# Altium PCB MotorControlCircruit_ver1.1.PcbDoc
Units mm, origin at the board's own origin, x right, y up, seen from the top; angles counter-clockwise.
Board outline 87.38 x 68.07 mm, 2 copper layers (Top Layer, Bottom Layer); 44 components, 10 nets, 284 pads, 32 vias.
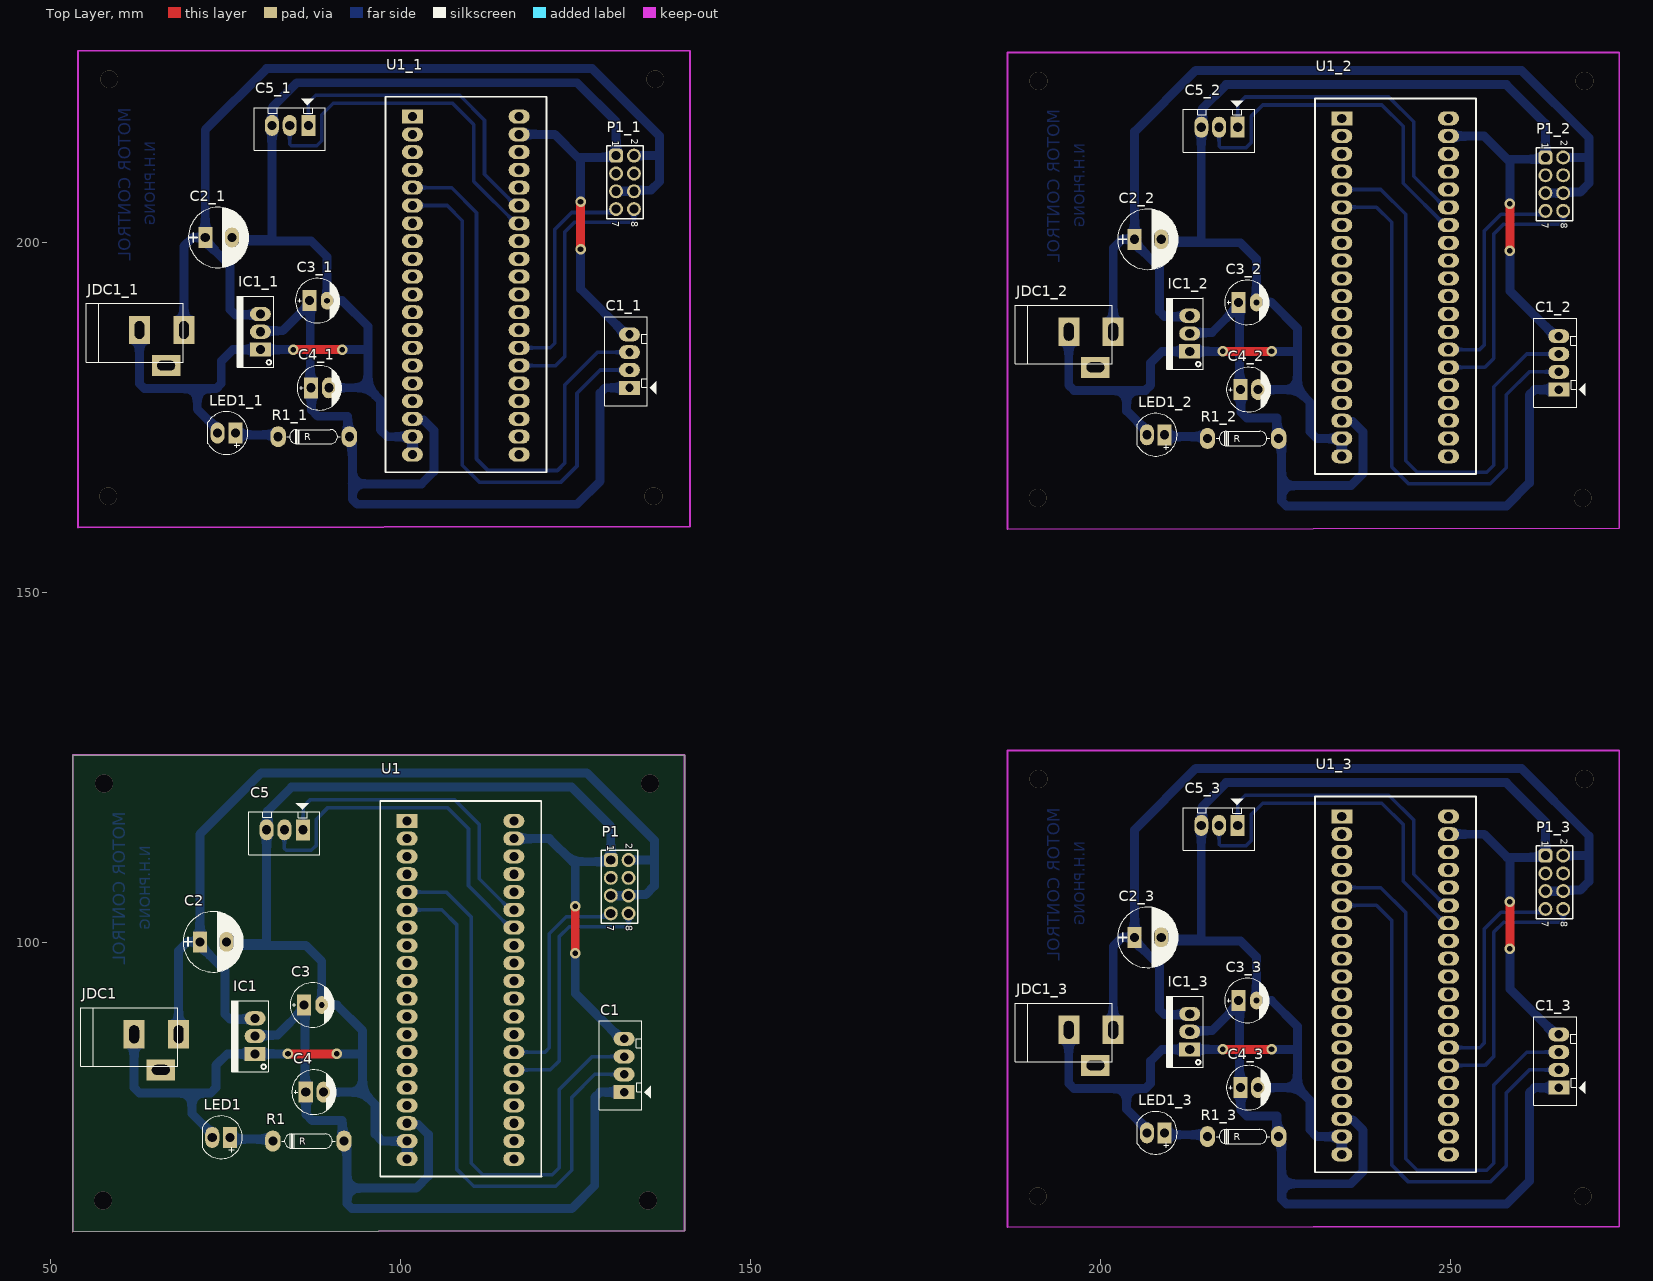
[diagram p0: Top Layer view]
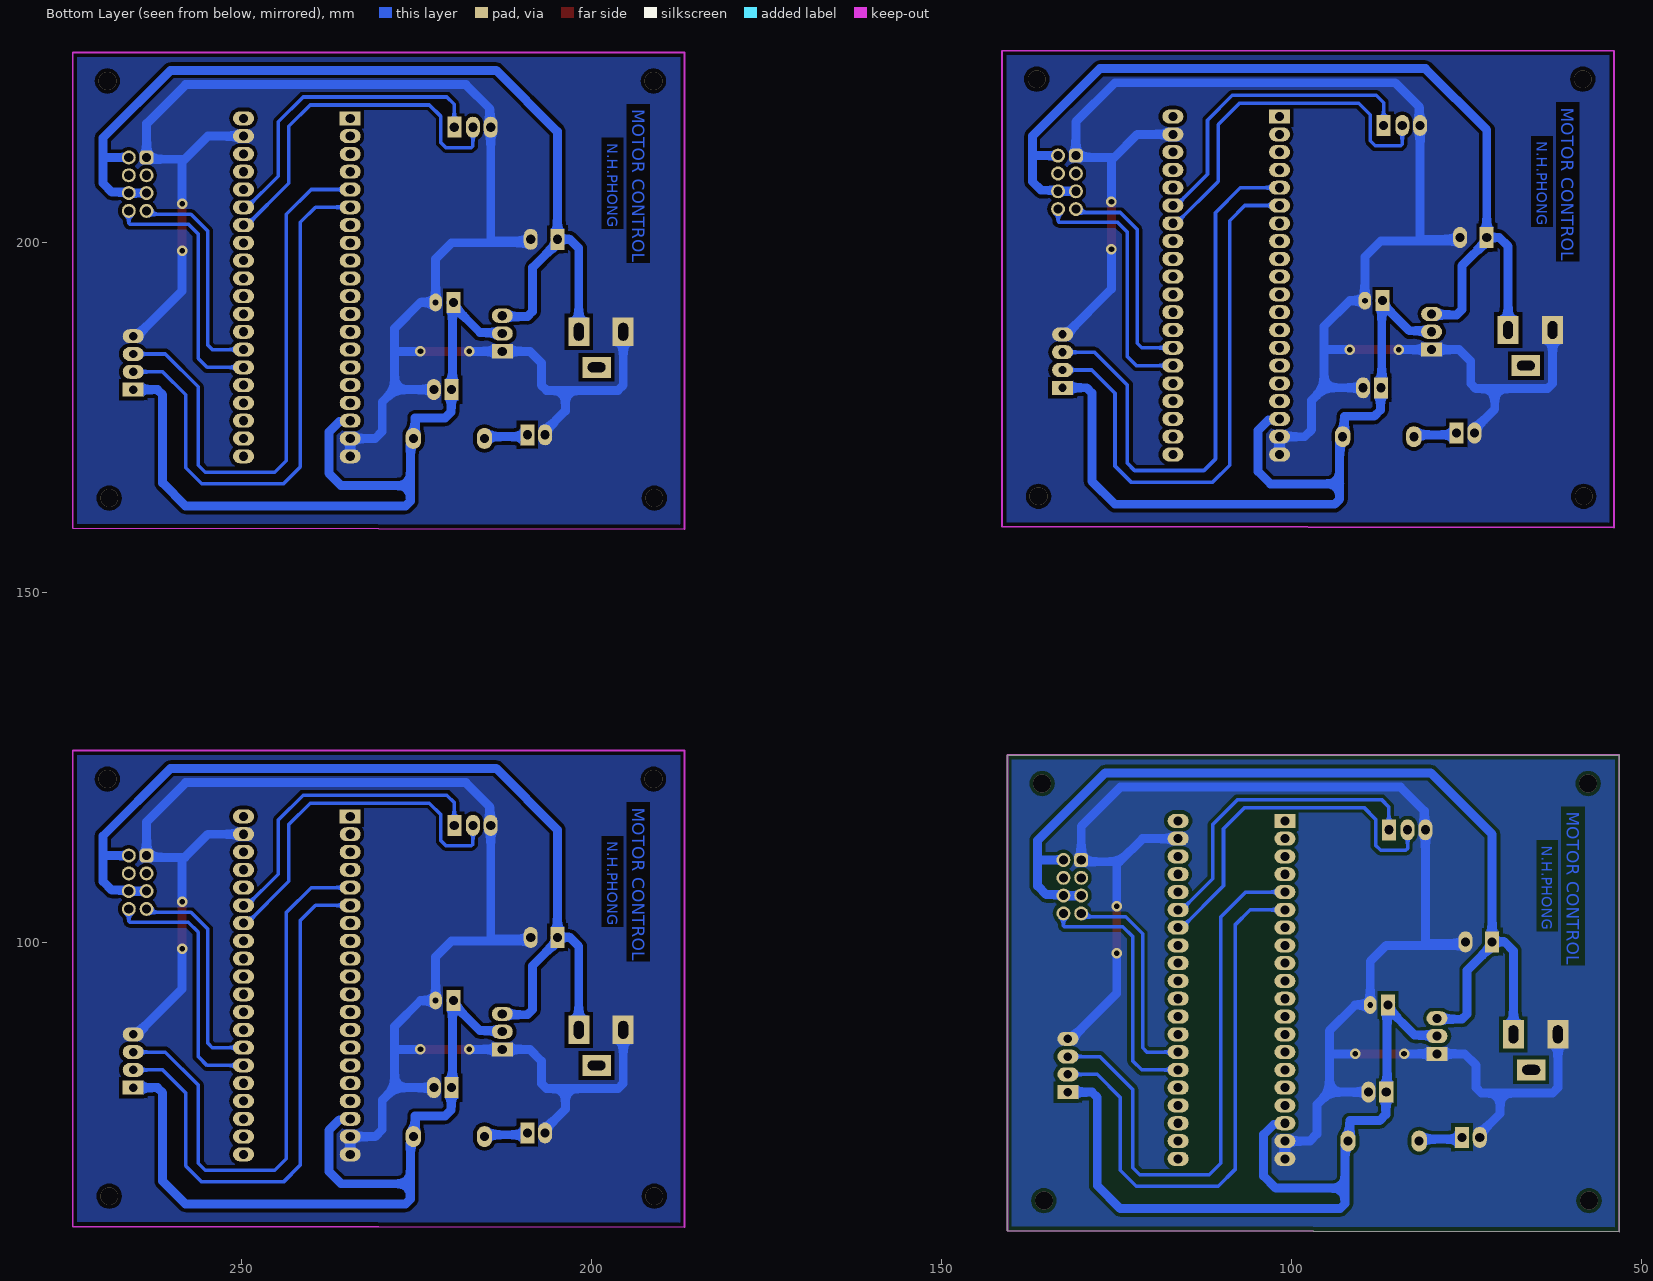
[diagram p1: Bottom Layer view, seen from below]

## Layer stack, top to bottom
Top Solder: solder mask 0.0102, Solder Resist, Dk 3.5
Top Layer: signal copper 0.0356
Dielectric 1: dielectric 0.32, FR-4, Dk 4.8
Bottom Layer: signal copper 0.0356
Bottom Solder: solder mask 0.0102, Solder Resist, Dk 3.5

## Board outline
53.213,58.68 53.213,126.746 140.589,126.746 140.589,58.801

## Design rules (kind name [scope] priority, off if disabled: settings)
Clearance [All] p1: gap=0.508 ignorepadtopadclearanceinfootprint=FALSE
PolygonConnect [All] p1: connectstyle=Direct reliefconductorwidth=0.254 reliefentries=4 polygonreliefangle="90 Angle" airgapwidth=0.254
RoutingVias [All] p1: holewidth=0.8 width=1.5 viastyle="Through Hole" minholewidth=0.8 minwidth=1.5 maxholewidth=0.8 maxwidth=1.5
SolderMaskExpansion [All] p1: expansion=0.102
Width [All] p1: maxlimit=1.27 minlimit=0.508 preferedwidth=0.762
30 further rules are at their usual default settings.

## Classes and differential pairs
component class MotorControlCircruit: C1 C2 C3 C4 C5 IC1 JDC1 LED1 P1 R1 U1

## Components (designator, comment, footprint, x,y, rotation, side; value= is the part's Value field where it differs from the comment)
C1 "Header4" Header4 131.953,78.613 r90 top
C1_1 "Header4" Header4 132.715,179.197 r90 top (schematic designator C1)
C1_2 "Header4" Header4 265.43,178.943 r90 top (schematic designator C1)
C1_3 "Header4" Header4 265.43,79.248 r90 top (schematic designator C1)
C2 "Cap Pol" CP1.5/3.4 71.374,100.076 r0 top value=100uF
C2_1 "Cap Pol" CP1.5/3.4 72.136,200.66 r0 top value=100uF (schematic designator C2)
C2_2 "Cap Pol" CP1.5/3.4 204.851,200.406 r0 top value=100uF (schematic designator C2)
C2_3 "Cap Pol" CP1.5/3.4 204.851,100.711 r0 top value=100uF (schematic designator C2)
C3 "Cap Pol" CP1/2.5#1 86.233,91.059 r0 top value=10uF
C3_1 "Cap Pol" CP1/2.5#1 86.995,191.643 r0 top value=10uF (schematic designator C3)
C3_2 "Cap Pol" CP1/2.5#1 219.71,191.389 r0 top value=10uF (schematic designator C3)
C3_3 "Cap Pol" CP1/2.5#1 219.71,91.694 r0 top value=10uF (schematic designator C3)
C4 "Cap Pol" CP1/2.5#2 86.487,78.613 r0 top value=0.1uF
C4_1 "Cap Pol" CP1/2.5#2 87.249,179.197 r0 top value=0.1uF (schematic designator C4)
C4_2 "Cap Pol" CP1/2.5#2 219.964,178.943 r0 top value=0.1uF (schematic designator C4)
C4_3 "Cap Pol" CP1/2.5#2 219.964,79.248 r0 top value=0.1uF (schematic designator C4)
C5 "Header3" Header3 85.979,116.078 r180 top
C5_1 "Header3" Header3 86.741,216.662 r180 top (schematic designator C5)
C5_2 "Header3" Header3 219.456,216.408 r180 top (schematic designator C5)
C5_3 "Header3" Header3 219.456,116.713 r180 top (schematic designator C5)
IC1 "LM1117" QTO-220 79.248,84.074 r90 top value=LM317
IC1_1 "LM1117" QTO-220 80.01,184.658 r90 top value=LM317 (schematic designator IC1)
IC1_2 "LM1117" QTO-220 212.725,184.404 r90 top value=LM317 (schematic designator IC1)
IC1_3 "LM1117" QTO-220 212.725,84.709 r90 top value=LM317 (schematic designator IC1)
JDC1 "Jack DC" DC-IN 65.151,84.328 r0 top value="Jac DC"
JDC1_1 "Jack DC" DC-IN 65.913,184.912 r0 top value="Jac DC" (schematic designator JDC1)
JDC1_2 "Jack DC" DC-IN 198.628,184.658 r0 top value="Jac DC" (schematic designator JDC1)
JDC1_3 "Jack DC" DC-IN 198.628,84.963 r0 top value="Jac DC" (schematic designator JDC1)
LED1 "LED" LED-5-RED 75.674,72.159 r180 top value="LED 3 ly Single Colour"
LED1_1 "LED" LED-5-RED 76.436,172.743 r180 top value="LED 3 ly Single Colour" (schematic designator LED1)
LED1_2 "LED" LED-5-RED 209.151,172.489 r180 top value="LED 3 ly Single Colour" (schematic designator LED1)
LED1_3 "LED" LED-5-RED 209.151,72.794 r180 top value="LED 3 ly Single Colour" (schematic designator LED1)
P1 "61300821121" 61300821121 131.318,107.95 r270 top
P1_1 "61300821121" 61300821121 132.08,208.534 r270 top (schematic designator P1)
P1_2 "61300821121" 61300821121 264.795,208.28 r270 top (schematic designator P1)
P1_3 "61300821121" 61300821121 264.795,108.585 r270 top (schematic designator P1)
R1 "RESISTOR" "RES 1/4 W" 81.788,71.628 r0 top value=1K
R1_1 "RESISTOR" "RES 1/4 W" 82.55,172.212 r0 top value=1K (schematic designator R1)
R1_2 "RESISTOR" "RES 1/4 W" 215.265,171.958 r0 top value=1K (schematic designator R1)
R1_3 "RESISTOR" "RES 1/4 W" 215.265,72.263 r0 top value=1K (schematic designator R1)
U1 "Bluepill" "Blue Pill" 116.205,117.348 r180 top
U1_1 "Bluepill" "Blue Pill" 116.967,217.932 r180 top (schematic designator U1)
U1_2 "Bluepill" "Blue Pill" 249.682,217.678 r180 top (schematic designator U1)
U1_3 "Bluepill" "Blue Pill" 249.682,117.983 r180 top (schematic designator U1)

## Footprints (in the part's own frame and the unit in brackets; to place one, negate y for a bottom-side part, rotate by r counter-clockwise, add the part's x,y. Pads: shape width x height; smd on the part's side, far side on the other; paste and mask are expansions set on the pad)
61300821121 [mm] "Pin Header, pitch 2.54 mm, THT, Vertical, dual row, 8p"
  rrect50% 2x2 hole 1.3: 1(-3.81,-1.27)
  round 2 hole 1.3: 2(-3.81,1.27) 3(-1.27,-1.27) 4(-1.27,1.27) 5(1.27,-1.27) 6(1.27,1.27) 7(3.81,-1.27) 8(3.81,1.27)
  silkscreen extent -5.23,-2.62 5.23,2.62, body extent -5.08,-2.54 5.08,2.54, height 8.59
"Blue Pill" [mm]
  oval 3x2 hole 1.3: 1(0,48.26) 2(0,45.72) 3(0,43.18) 4(0,40.64) 5(0,38.1) 6(0,35.56) 7(0,33.02) 8(0,30.48) 9(0,27.94) 10(0,25.4) 11(0,22.86) 12(0,20.32) 13(0,17.78) 14(0,15.24) 15(0,12.7) 16(0,10.16) 17(0,7.62) 18(0,5.08) 19(0,2.54) 20(0,0) 22(15.24,2.54) 23(15.24,5.08) 24(15.24,7.62) 25(15.24,10.16) 26(15.24,12.7) 27(15.24,15.24) 28(15.24,17.78) 29(15.24,20.32) 30(15.24,22.86) 31(15.24,25.4) 32(15.24,27.94) 33(15.24,30.48) 34(15.24,33.02) 35(15.24,35.56) 36(15.24,38.1) 37(15.24,40.64) 38(15.24,43.18) 39(15.24,45.72) 40(15.24,48.26)
  rect 3x2 hole 1.3: 21(15.24,0)
  silkscreen extent -3.94,-2.84 19.08,50.8, body extent -3.84,-5.95 19.02,51.61, height 12.31
CP1.5/3.4 [mm] "Tu hoa 220->470uF,16V, 470uF/16V,25V"
  rect 2x3 hole 1.3: 1(0,0)
  oval 2x3 hole 1.3: 2(3.81,0)
  silkscreen extent -2.41,-4.32 6.22,4.32, body extent -2.16,-4 5.84,4, height 11.33
CP1/2.5#1 [mm] "Tu hoa 33 >100 uF,50V, 220uF/16V,25V"
  rect 2x3 hole 1.3: 1(0,0)
  oval 1.778x2.54 hole 0.813: 2(2.54,0)
  silkscreen extent -1.99,-3.17 4.36,3.17, body extent -1.93,-3.15 4.37,3.15, height 10.71
CP1/2.5#2 [mm] "Tu hoa 33 >100 uF,50V, 220uF/16V,25V"
  rect 2x3 hole 1.3: 1(0,0)
  oval 2x3 hole 1.3: 2(2.54,0)
  silkscreen extent -1.99,-3.17 4.36,3.17, body extent -1.93,-3.15 4.37,3.15, height 10.71
DC-IN [mm] "Jac DC input"
  rect 3x4.064 hole 1.4 slot 2.54 at 90 deg: 1(3.175,2.54) 2(-3.175,2.54)
  rect 4.064x3 hole 1.4 slot 2.54 at 0 deg: 3(0.635,-2.54)
  silkscreen extent -10.79,-2.03 3.05,6.35, body extent -10.42,-2.67 3.4,6.84, height 11.02
Header3 [mm] "CON 3"
  rect 2x3 hole 1.3: 1(-0.127,0)
  oval 2x3 hole 1.3: 2(2.54,0) 3(5.08,0)
  silkscreen extent -2.54,-3.8 7.62,3.56, body extent -2.41,-2.29 7.49,3.46, height 7
Header4 [mm] "CON4"
  rect 2x3 hole 1.2: 1(0,0)
  oval 2x3 hole 1.2: 2(2.54,0) 3(5.08,0) 4(7.62,0)
  silkscreen extent -2.54,-3.8 10.16,3.56, body extent -2.29,-2.29 10.11,3.46, height 7
LED-5-RED [mm] "LED 2 PIN, 5 ly , Only colour,pin to pin 100mil"
  rect 2x3 hole 1.3: 1(0,0)
  oval 2x3 hole 1.3: 2(2.54,0)
  silkscreen extent -1.77,-3.05 3.91,3.04, body extent -1.64,-3.02 3.78,3, height 8.62
QTO-220 [mm] "TO-220 - 1-2-3"
  rect 2.032x3 hole 1.3: 1(0,0)
  oval 2.032x3 hole 1.3: 2(2.54,0) 3(5.08,0)
  silkscreen extent -2.54,-1.93 7.62,3.3, body extent -3.02,-1.63 8.19,3.06, height 19.17
"RES 1/4 W" [mm]
  oval 2.2x3 hole 1.3: 1(0,0) 2(10.16,0)
  silkscreen extent 1.26,-1.02 8.88,1.02, body extent -0.3,-1.16 10.46,1.16, height 2.93

## Part data
C1 C1_1 C1_2 C1_3: "Header IDC, 4 x 1 Pin Vertical 2.54mm Pitch (Non-Boxed, Male)", Manufacturer="Würth Elektronik eiSos GmbH", partNo=613002143121, ComponentLink1 Description=Manufacturer, ComponentLink1URL=http://www.we-online.com, ComponentLink2 Description=Datasheet, ComponentLink2URL=http://katalog.we-online.de/em/datasheet/6130xx143121.pdf, Created by="Karrer Zheng", Created Date="29 March 2013", NoPins=02
C2 C2_1 C2_2 C2_3 C3 C3_1 C3_2 C3_3 C4 C4_1 C4_2 C4_3: "Polarized Capacitor (Radial)"
C5 C5_1 C5_2 C5_3: "Header IDC, 3 x 1 Pin Vertical 2.54mm Pitch (Non-Boxed, Male)", Manufacturer="Würth Elektronik eiSos GmbH", partNo=613002143121, ComponentLink1 Description=Manufacturer, ComponentLink1URL=http://www.we-online.com, ComponentLink2 Description=Datasheet, ComponentLink2URL=http://katalog.we-online.de/em/datasheet/6130xx143121.pdf, Created by="Karrer Zheng", Created Date="29 March 2013", NoPins=02
IC1 IC1_1 IC1_2 IC1_3: "Available in 1.8V, 2.5V, 2.85V, 3.3V, 5V, and  Adjustable Versions"
JDC1 JDC1_1 JDC1_2 JDC1_3: "Jack DC input"
LED1 LED1_1 LED1_2 LED1_3: "LED Single colour Green and Red"
P1 P1_1 P1_2 P1_3: "WR-PHD Pin Header, THT, Vertical, pitch 2.54mm, 2 Row, 8P", Contact Resistance=20mO, Manufacturer="Wurth Elektronik", Operating Temperature Max=105癈, Operating Temperature Min=-40癈, Rated Current=3A, Withstanding Voltage=500V, Working Voltage=250V, Category="Board-to-Board Connectors", ComponentLink1Description="Website Link", ComponentLink1URL=https://www.we-online.com/redexpert/article/61300821121?ad, ComponentLink2Description="Datasheet Link", ComponentLink2URL=https://www.we-online.com/redexpert/spec/61300821121?ad, Gender="Pin Header", Manufacturer Part Number=61300821121, Match Code=WR-PHD, Mount="Through Hole", Number of Pins=8, Number of Rows=2, Orientation=Vertical, Packaging=Bag, Pitch=2.54mm
R1 R1_1 R1_2 R1_3: "Resistor"
U1 U1_1 U1_2 U1_3: library part STM32F103C8T6, "STM32F103C8T6"

## Via types
v1: diameter 1.5, hole 0.8, Top Layer to Bottom Layer, 16 vias
v2: diameter 2.54, hole 2.54, Top Layer to Bottom Layer, 16 vias

## Nets (pads, with @x,y where several pads share a name; then routed paths per layer and width w, separated by ;. In a path a pad name is that pad's centre, name@x,y a point inside that pad or via, vN(x,y) a via of type N, cw(c..) or ccw(c..) an arc to the next point about the centre after c; other vN are vias at no path point)
3V3: C1.1 C3.1 C4.1 IC1.2 R1.2 U1.38 | length 119
  Bottom Layer w1.27: IC1.2 79.394,86.76 82.434,86.76 86.233,90.559 C3.1 86.36,90.932 C3.1@86.36,90.805 ; C3.1@86.614,91.059 C3.1@86.36,90.805 ; U1.38 101.105,74.028 102.52,74.028 104.013,72.535 104.013,66.657 102.253,64.897 92.378,64.897 ; C1.1 128.506,78.613 127.762,77.869 127.762,65.278 124.46,61.976 93.091,61.976 92.378,62.689 92.378,64.897 ; C3.1@86.36,90.805 86.36,78.74 C4.1 86.55,78.549 86.55,75.438 87.439,74.549 91.694,74.549 91.694,72.534 91.948,72.28 R1.2 91.948,71.48 92.378,71.05 92.378,64.897
5V: C2.1 IC1.3 JDC1.1 P1.2 P1.5 P1.6 | length 136.5
  Bottom Layer w1.27: JDC1.1 68.326,98.806 69.596,100.076 C2.1 71.374,115.443 80.137,124.206 126.619,124.206 136.271,114.554 136.271,108.077 135.014,106.82 132.728,106.82 P1.6 P1.5 ; C2.1@71.374,99.576 74.93,96.02 74.93,89.771 75.674,89.027 79.121,89.027 IC1.3 ; P1.2@132.728,111.9 P1.2 136.123,111.76 136.197,111.686
GND: C1.4 C2.2 C3.2 C4.2 C5.3 IC1.1 JDC1.2 LED1.2 P1.1 U1.19 U1.39 U1.40 | length 236.1
  Top Layer w1.27: v1(83.947,84.074) v1(90.932,84.074) ; v1(124.968,98.425) v1(124.968,105.156)
  Bottom Layer w1.27: JDC1.2 61.976,79.23 62.72,78.486 70.231,78.486 ; LED1.2 73.134,72.659 70.231,75.562 70.231,78.486 ; v1(83.947,84.074) IC1.1 75.311,84.074 73.66,82.423 73.66,79.23 72.916,78.486 70.231,78.486 ; C4.2@89.154,78.74 C4.2 94.615,78.613 ; v1(90.932,84.074) 94.361,84.074 94.615,83.82 ; U1.40@100.825,69.228 U1.40 U1.39 97.402,71.628 96.393,72.637 96.393,76.835 94.615,78.613 ; U1.19 121.285,114.808 124.587,111.506 ; v1(124.968,98.425) 124.968,92.718 131.453,86.233 C1.4 ; v1(124.968,105.156) 124.968,111.125 124.587,111.506 ; 94.615,78.613 94.615,83.82 ; 94.615,83.82 94.615,87.376 90.932,91.059 C3.2 88.773,97.29 86.487,99.576 75.521,99.576 75.184,99.913 C2.2 75.438,99.822 80.899,99.822 C5.3 81.039,116.218 81.039,118.758 84.455,122.174 124.46,122.174 130.048,116.586 P1.1 129.794,111.506 124.587,111.506
LPWM: P1.7 U1.7 | length 31.6
  Bottom Layer w0.508: U1.7 120.65,84.328 121.285,84.963 121.285,101.219 123.71,103.644 129.552,103.644 P1.7
NetLED1_1: LED1.1 R1.1 | length 7.3
  Bottom Layer w1.27: LED1.1@76.039,72.736 75.674,72.371 LED1.1 75.939,71.893 81.523,71.893 R1.1 R1.1@81.61,71.45
RPWM: P1.8 U1.6 | length 37.2
  Bottom Layer w0.508: U1.6 121.412,81.788 122.682,83.058 122.682,100.838 124.095,102.251 132.461,102.251 132.588,102.378 P1.8 P1.8@132.477,104.029
RX: C5.1 U1.15 | length 44.9
  Bottom Layer w0.508: C5.1 86.106,119.336 87.166,120.396 107.696,120.396 111.252,116.84 111.252,109.101 115.705,104.648 U1.15
TIM2_CH1: C1.3 U1.25 | length 82.4
  Bottom Layer w0.508: U1.25@101.219,106.934 U1.25 106.553,107.188 110.109,103.632 110.109,68.453 111.76,66.802 121.666,66.802 122.682,67.818 122.682,78.994 127.381,83.693 C1.3 C1.3@131.826,83.566
TIM2_CH2: C1.2 U1.26 | length 80.5
  Bottom Layer w0.508: U1.26 105.918,104.648 108.077,102.489 108.077,67.564 110.49,65.151 122.174,65.151 124.46,67.437 124.46,77.851 127.762,81.153 C1.2
TX: C5.2 U1.14 | length 52.1
  Bottom Layer w0.508: C5.2 83.439,113.411 83.693,113.157 87.293,113.157 88.011,113.875 88.011,117.602 89.662,119.253 106.68,119.253 109.728,116.205 109.728,108.085 115.705,102.108 U1.14
pads on no net: C1_1.1 C1_1.2 C1_1.3 C1_1.4 C1_2.1 C1_2.2 C1_2.3 C1_2.4 C1_3.1 C1_3.2 C1_3.3 C1_3.4 C2_1.1 C2_1.2 C2_2.1 C2_2.2 C2_3.1 C2_3.2 C3_1.1 C3_1.2 C3_2.1 C3_2.2 C3_3.1 C3_3.2 C4_1.1 C4_1.2 C4_2.1 C4_2.2 C4_3.1 C4_3.2 C5_1.1 C5_1.2 C5_1.3 C5_2.1 C5_2.2 C5_2.3 C5_3.1 C5_3.2 C5_3.3 IC1_1.1 IC1_1.2 IC1_1.3 IC1_2.1 IC1_2.2 IC1_2.3 IC1_3.1 IC1_3.2 IC1_3.3 JDC1.3 JDC1_1.1 JDC1_1.2 JDC1_1.3 JDC1_2.1 JDC1_2.2 JDC1_2.3 JDC1_3.1 JDC1_3.2 JDC1_3.3 LED1_1.1 LED1_1.2 LED1_2.1 LED1_2.2 LED1_3.1 LED1_3.2 P1.3 P1.4 P1_1.1 P1_1.2 P1_1.3 P1_1.4 P1_1.5 P1_1.6 P1_1.7 P1_1.8 P1_2.1 P1_2.2 P1_2.3 P1_2.4 P1_2.5 P1_2.6 P1_2.7 P1_2.8 P1_3.1 P1_3.2 P1_3.3 P1_3.4 P1_3.5 P1_3.6 P1_3.7 P1_3.8 R1_1.1 R1_1.2 R1_2.1 R1_2.2 R1_3.1 R1_3.2 U1.1 U1.2 U1.3 U1.4 U1.5 U1.8 U1.9 U1.10 U1.11 U1.12 U1.13 U1.16 U1.17 U1.18 U1.20 U1.21 U1.22 U1.23 U1.24 U1.27 U1.28 U1.29 U1.30 U1.31 U1.32 U1.33 U1.34 U1.35 U1.36 U1.37 U1_1.1 U1_1.2 U1_1.3 U1_1.4 U1_1.5 U1_1.6 U1_1.7 U1_1.8 U1_1.9 U1_1.10 U1_1.11 U1_1.12 U1_1.13 U1_1.14 U1_1.15 U1_1.16 U1_1.17 U1_1.18 U1_1.19 U1_1.20 U1_1.21 U1_1.22 U1_1.23 U1_1.24 U1_1.25 U1_1.26 U1_1.27 U1_1.28 U1_1.29 U1_1.30 U1_1.31 U1_1.32 U1_1.33 U1_1.34 U1_1.35 U1_1.36 U1_1.37 U1_1.38 U1_1.39 U1_1.40 U1_2.1 U1_2.2 U1_2.3 U1_2.4 U1_2.5 U1_2.6 U1_2.7 U1_2.8 U1_2.9 U1_2.10 U1_2.11 U1_2.12 U1_2.13 U1_2.14 U1_2.15 U1_2.16 U1_2.17 U1_2.18 U1_2.19 U1_2.20 U1_2.21 U1_2.22 U1_2.23 U1_2.24 U1_2.25 U1_2.26 U1_2.27 U1_2.28 U1_2.29 U1_2.30 U1_2.31 U1_2.32 U1_2.33 U1_2.34 U1_2.35 U1_2.36 U1_2.37 U1_2.38 U1_2.39 U1_2.40 U1_3.1 U1_3.2 U1_3.3 U1_3.4 U1_3.5 U1_3.6 U1_3.7 U1_3.8 U1_3.9 U1_3.10 U1_3.11 U1_3.12 U1_3.13 U1_3.14 U1_3.15 U1_3.16 U1_3.17 U1_3.18 U1_3.19 U1_3.20 U1_3.21 U1_3.22 U1_3.23 U1_3.24 U1_3.25 U1_3.26 U1_3.27 U1_3.28 U1_3.29 U1_3.30 U1_3.31 U1_3.32 U1_3.33 U1_3.34 U1_3.35 U1_3.36 U1_3.37 U1_3.38 U1_3.39 U1_3.40
copper on no net: | length 2482.9
  Top Layer w1.27: v1(84.709,184.658) v1(91.694,184.658) ; v1(125.73,199.009) v1(125.73,205.74) ; v1(217.424,84.709) v1(224.409,84.709) ; v1(217.424,184.404) v1(224.409,184.404) ; v1(258.445,99.06) v1(258.445,105.791) ; v1(258.445,198.755) v1(258.445,205.486)
  Bottom Layer w0.508: 84.201,216.662 84.201,213.995 84.455,213.741 88.055,213.741 88.773,214.459 88.773,218.186 90.424,219.837 107.442,219.837 110.49,216.789 110.49,208.669 116.467,202.692 116.967,202.692 ; 86.868,216.662 86.868,219.92 87.928,220.98 108.458,220.98 112.014,217.424 112.014,209.685 116.467,205.232 116.967,205.232 ; 101.727,205.232 106.68,205.232 108.839,203.073 108.839,168.148 111.252,165.735 122.936,165.735 125.222,168.021 125.222,178.435 128.524,181.737 132.715,181.737 ; 101.981,207.518 101.727,207.772 107.315,207.772 110.871,204.216 110.871,169.037 112.522,167.386 122.428,167.386 123.444,168.402 123.444,179.578 128.143,184.277 132.715,184.277 132.588,184.15 ; 116.967,182.372 122.174,182.372 123.444,183.642 123.444,201.422 124.857,202.835 133.223,202.835 133.35,202.962 133.35,204.724 133.239,204.613 ; 116.967,184.912 121.412,184.912 122.047,185.547 122.047,201.803 124.472,204.228 130.314,204.228 130.81,204.724 ; 216.916,116.713 216.916,114.046 217.17,113.792 220.77,113.792 221.488,114.51 221.488,118.237 223.139,119.888 240.157,119.888 243.205,116.84 243.205,108.72 249.182,102.743 249.682,102.743 ; 216.916,216.408 216.916,213.741 217.17,213.487 220.77,213.487 221.488,214.205 221.488,217.932 223.139,219.583 240.157,219.583 243.205,216.535 243.205,208.415 249.182,202.438 249.682,202.438 ; 219.583,116.713 219.583,119.971 220.643,121.031 241.173,121.031 244.729,117.475 244.729,109.736 249.182,105.283 249.682,105.283 ; 219.583,216.408 219.583,219.666 220.643,220.726 241.173,220.726 244.729,217.17 244.729,209.431 249.182,204.978 249.682,204.978 ; 234.442,105.283 239.395,105.283 241.554,103.124 241.554,68.199 243.967,65.786 255.651,65.786 257.937,68.072 257.937,78.486 261.239,81.788 265.43,81.788 ; 234.442,204.978 239.395,204.978 241.554,202.819 241.554,167.894 243.967,165.481 255.651,165.481 257.937,167.767 257.937,178.181 261.239,181.483 265.43,181.483 ; 234.696,107.569 234.442,107.823 240.03,107.823 243.586,104.267 243.586,69.088 245.237,67.437 255.143,67.437 256.159,68.453 256.159,79.629 260.858,84.328 265.43,84.328 265.303,84.201 ; 234.696,207.264 234.442,207.518 240.03,207.518 243.586,203.962 243.586,168.783 245.237,167.132 255.143,167.132 256.159,168.148 256.159,179.324 260.858,184.023 265.43,184.023 265.303,183.896 ; 249.682,82.423 254.889,82.423 256.159,83.693 256.159,101.473 257.572,102.886 265.938,102.886 266.065,103.013 266.065,104.775 265.954,104.664 ; 249.682,84.963 254.127,84.963 254.762,85.598 254.762,101.854 257.187,104.279 263.029,104.279 263.525,104.775 ; 249.682,182.118 254.889,182.118 256.159,183.388 256.159,201.168 257.572,202.581 265.938,202.581 266.065,202.708 266.065,204.47 265.954,204.359 ; 249.682,184.658 254.127,184.658 254.762,185.293 254.762,201.549 257.187,203.974 263.029,203.974 263.525,204.47
  Bottom Layer w1.27: 62.738,187.452 62.738,179.814 63.482,179.07 70.993,179.07 ; 69.088,187.452 69.088,199.39 70.358,200.66 72.136,200.66 72.136,216.027 80.899,224.79 127.381,224.79 137.033,215.138 137.033,208.661 135.776,207.404 133.49,207.404 133.35,207.264 130.81,207.264 ; 72.136,200.16 75.692,196.604 75.692,190.355 76.436,189.611 79.883,189.611 80.01,189.738 ; 73.896,172.743 73.896,173.243 70.993,176.146 70.993,179.07 ; 76.801,173.32 76.436,172.955 76.436,172.743 76.701,172.477 82.285,172.477 82.55,172.212 82.372,172.034 ; 80.01,187.198 80.156,187.344 83.196,187.344 86.995,191.143 86.995,191.643 87.122,191.516 87.122,191.389 ; v1(84.709,184.658) 80.01,184.658 76.073,184.658 74.422,183.007 74.422,179.814 73.678,179.07 70.993,179.07 ; 87.376,191.643 87.122,191.389 ; 89.916,179.324 89.789,179.197 95.377,179.197 ; v1(91.694,184.658) 95.123,184.658 95.377,184.404 ; 101.587,169.812 101.727,169.672 101.727,172.212 98.164,172.212 97.155,173.221 97.155,177.419 95.377,179.197 ; 101.727,174.752 101.867,174.612 103.282,174.612 104.775,173.119 104.775,167.241 103.015,165.481 93.14,165.481 ; 116.967,215.392 122.047,215.392 125.349,212.09 ; v1(125.73,199.009) 125.73,193.302 132.215,186.817 132.715,186.817 ; v1(125.73,205.74) 125.73,211.709 125.349,212.09 ; 132.715,179.197 129.268,179.197 128.524,178.453 128.524,165.862 125.222,162.56 93.853,162.56 93.14,163.273 93.14,165.481 ; 133.49,212.484 133.35,212.344 136.885,212.344 136.959,212.27 ; 195.453,87.503 195.453,79.865 196.197,79.121 203.708,79.121 ; 195.453,187.198 195.453,179.56 196.197,178.816 203.708,178.816 ; 201.803,87.503 201.803,99.441 203.073,100.711 204.851,100.711 204.851,116.078 213.614,124.841 260.096,124.841 269.748,115.189 269.748,108.712 268.491,107.455 266.205,107.455 266.065,107.315 263.525,107.315 ; 201.803,187.198 201.803,199.136 203.073,200.406 204.851,200.406 204.851,215.773 213.614,224.536 260.096,224.536 269.748,214.884 269.748,208.407 268.491,207.15 266.205,207.15 266.065,207.01 263.525,207.01 ; 204.851,100.211 208.407,96.655 208.407,90.406 209.151,89.662 212.598,89.662 212.725,89.789 ; 204.851,199.906 208.407,196.35 208.407,190.101 209.151,189.357 212.598,189.357 212.725,189.484 ; 206.611,72.794 206.611,73.294 203.708,76.197 203.708,79.121 ; 206.611,172.489 206.611,172.989 203.708,175.892 203.708,178.816 ; 209.516,73.371 209.151,73.006 209.151,72.794 209.416,72.528 215,72.528 215.265,72.263 215.087,72.085 ; 209.516,173.066 209.151,172.701 209.151,172.489 209.416,172.223 215,172.223 215.265,171.958 215.087,171.78 ; 212.725,87.249 212.871,87.395 215.911,87.395 219.71,91.194 219.71,91.694 219.837,91.567 219.837,91.44 ; 212.725,186.944 212.871,187.09 215.911,187.09 219.71,190.889 219.71,191.389 219.837,191.262 219.837,191.135 ; v1(217.424,84.709) 212.725,84.709 208.788,84.709 207.137,83.058 207.137,79.865 206.393,79.121 203.708,79.121 ; v1(217.424,184.404) 212.725,184.404 208.788,184.404 207.137,182.753 207.137,179.56 206.393,178.816 203.708,178.816 ; 220.091,91.694 219.837,91.44 ; 220.091,191.389 219.837,191.135 ; 222.631,79.375 222.504,79.248 228.092,79.248 ; 222.631,179.07 222.504,178.943 228.092,178.943 ; v1(224.409,84.709) 227.838,84.709 228.092,84.455 ; v1(224.409,184.404) 227.838,184.404 228.092,184.15 ; 234.302,69.863 234.442,69.723 234.442,72.263 230.879,72.263 229.87,73.272 229.87,77.47 228.092,79.248 ; 234.302,169.558 234.442,169.418 234.442,171.958 230.879,171.958 229.87,172.967 229.87,177.165 228.092,178.943 ; 234.442,74.803 234.582,74.663 235.997,74.663 237.49,73.17 237.49,67.292 235.73,65.532 225.855,65.532 ; 234.442,174.498 234.582,174.358 235.997,174.358 237.49,172.865 237.49,166.987 235.73,165.227 225.855,165.227 ; 249.682,115.443 254.762,115.443 258.064,112.141 ; 249.682,215.138 254.762,215.138 258.064,211.836 ; v1(258.445,99.06) 258.445,93.353 264.93,86.868 265.43,86.868 ; v1(258.445,105.791) 258.445,111.76 258.064,112.141 ; v1(258.445,198.755) 258.445,193.048 264.93,186.563 265.43,186.563 ; v1(258.445,205.486) 258.445,211.455 258.064,211.836 ; 265.43,79.248 261.983,79.248 261.239,78.504 261.239,65.913 257.937,62.611 226.568,62.611 225.855,63.324 225.855,65.532 ; 265.43,178.943 261.983,178.943 261.239,178.199 261.239,165.608 257.937,162.306 226.568,162.306 225.855,163.019 225.855,165.227 ; 266.205,112.535 266.065,112.395 269.6,112.395 269.674,112.321 ; 266.205,212.23 266.065,212.09 269.6,212.09 269.674,212.016 ; 87.122,191.389 87.122,179.324 87.249,179.197 87.312,179.133 87.312,176.022 88.201,175.133 92.456,175.133 92.456,173.118 92.71,172.864 92.71,172.212 92.71,172.064 93.14,171.634 93.14,165.481 ; 95.377,179.197 95.377,184.404 ; 95.377,184.404 95.377,187.96 91.694,191.643 89.535,191.643 89.535,197.874 87.249,200.16 76.283,200.16 75.946,200.497 75.946,200.66 76.2,200.406 81.661,200.406 81.661,216.662 81.801,216.802 81.801,219.342 85.217,222.758 125.222,222.758 130.81,217.17 130.81,212.344 130.556,212.09 125.349,212.09 ; 219.837,91.44 219.837,79.375 219.964,79.248 220.028,79.184 220.028,76.073 220.916,75.184 225.171,75.184 225.171,73.169 225.425,72.915 225.425,72.263 225.425,72.115 225.855,71.685 225.855,65.532 ; 219.837,191.135 219.837,179.07 219.964,178.943 220.028,178.879 220.028,175.768 220.916,174.879 225.171,174.879 225.171,172.864 225.425,172.61 225.425,171.958 225.425,171.81 225.855,171.38 225.855,165.227 ; 228.092,79.248 228.092,84.455 ; 228.092,84.455 228.092,88.011 224.409,91.694 222.25,91.694 222.25,97.925 219.964,100.211 208.998,100.211 208.661,100.548 208.661,100.711 208.915,100.457 214.376,100.457 214.376,116.713 214.516,116.853 214.516,119.393 217.932,122.809 257.937,122.809 263.525,117.221 263.525,112.395 263.271,112.141 258.064,112.141 ; 228.092,178.943 228.092,184.15 ; 228.092,184.15 228.092,187.706 224.409,191.389 222.25,191.389 222.25,197.62 219.964,199.906 208.998,199.906 208.661,200.243 208.661,200.406 208.915,200.152 214.376,200.152 214.376,216.408 214.516,216.548 214.516,219.088 217.932,222.504 257.937,222.504 263.525,216.916 263.525,212.09 263.271,211.836 258.064,211.836
  other v2: 57.531,63.119 135.382,63.119 191.008,63.754 268.859,63.754 57.658,122.682 135.636,122.682 191.135,123.317 269.113,123.317 191.008,163.449 268.859,163.449 58.293,163.703 136.144,163.703 191.135,223.012 269.113,223.012 58.42,223.266 136.398,223.266

## Polygon pours and split planes (outlines as drawn)
GND on Bottom Layer "Top Layer-No Net" (solid, remove dead copper, pour order 27): 53.213,58.68 53.213,126.746 140.589,126.746 140.589,58.801
no net on Bottom Layer "Top Layer-No Net" (solid, remove dead copper, pour order 34): 186.69,59.315 186.69,127.381 274.066,127.381 274.066,59.436
no net on Bottom Layer "Top Layer-No Net" (solid, remove dead copper, pour order 32): 186.69,159.01 186.69,227.076 274.066,227.076 274.066,159.131
no net on Bottom Layer "Top Layer-No Net" (solid, remove dead copper, pour order 30): 53.975,159.264 53.975,227.33 141.351,227.33 141.351,159.385
no net on Bottom Layer "GND" (solid, remove dead copper, pour order 28): 65.532,121.793

## Keep-outs
Keep-Out Layer:
  lines w0.254: 53.213,58.68 53.213,126.746 140.589,126.746 140.589,58.801 53.213,58.68 ; 53.975,159.264 141.351,159.385 141.351,227.33 53.975,227.33 53.975,159.264 ; 186.69,59.315 274.066,59.436 274.066,127.381 186.69,127.381 186.69,59.315 ; 186.69,159.01 274.066,159.131 274.066,227.076 186.69,227.076 186.69,159.01

## Other copper
Bottom Layer:
  text "MOTOR CONTROL" at 61.468,219.202 h1.78 r90
  text "MOTOR CONTROL" at 194.183,218.948 h1.78 r90
  text "N.H.PHONG" at 65.024,214.376 h1.52 r90
  text "N.H.PHONG" at 197.739,214.122 h1.52 r90
  text "MOTOR CONTROL" at 194.183,119.253 h1.78 r90
  text "MOTOR CONTROL" at 60.706,118.618 h1.78 r90
  text "N.H.PHONG" at 197.739,114.427 h1.52 r90
  text "N.H.PHONG" at 64.262,113.792 h1.52 r90

## Text inside footprints (layer, text, board x,y; h text height)
P1: Top Overlay "8" at 132.218,102.41 h1.02 r270; Top Overlay "7" at 129.518,102.41 h1.02 r270; Top Overlay "2" at 132.218,114.19 h1.02 r270; Top Overlay "1" at 129.518,113.89 h1.02 r270
P1_1: Top Overlay "1" at 130.28,214.474 h1.02 r270; Top Overlay "2" at 132.98,214.774 h1.02 r270; Top Overlay "7" at 130.28,202.994 h1.02 r270; Top Overlay "8" at 132.98,202.994 h1.02 r270
P1_2: Top Overlay "1" at 262.995,214.22 h1.02 r270; Top Overlay "2" at 265.695,214.52 h1.02 r270; Top Overlay "7" at 262.995,202.74 h1.02 r270; Top Overlay "8" at 265.695,202.74 h1.02 r270
P1_3: Top Overlay "1" at 262.995,114.525 h1.02 r270; Top Overlay "2" at 265.695,114.825 h1.02 r270; Top Overlay "7" at 262.995,103.045 h1.02 r270; Top Overlay "8" at 265.695,103.045 h1.02 r270
R1: Top Overlay "R" at 85.534,71.107 h1
R1_1: Top Overlay "R" at 86.296,171.691 h1
R1_2: Top Overlay "R" at 219.011,171.437 h1
R1_3: Top Overlay "R" at 219.011,71.742 h1